# Altium PCB hoanchinh.PcbDoc
Units mm, origin at the board's own origin, x right, y up, seen from the top; angles counter-clockwise.
Board outline 100 x 100 mm, 4 copper layers (Top Layer, Internal Plane 1, Internal Plane 2, Bottom Layer); 28 components, 19 nets, 63 pads, 0 vias.
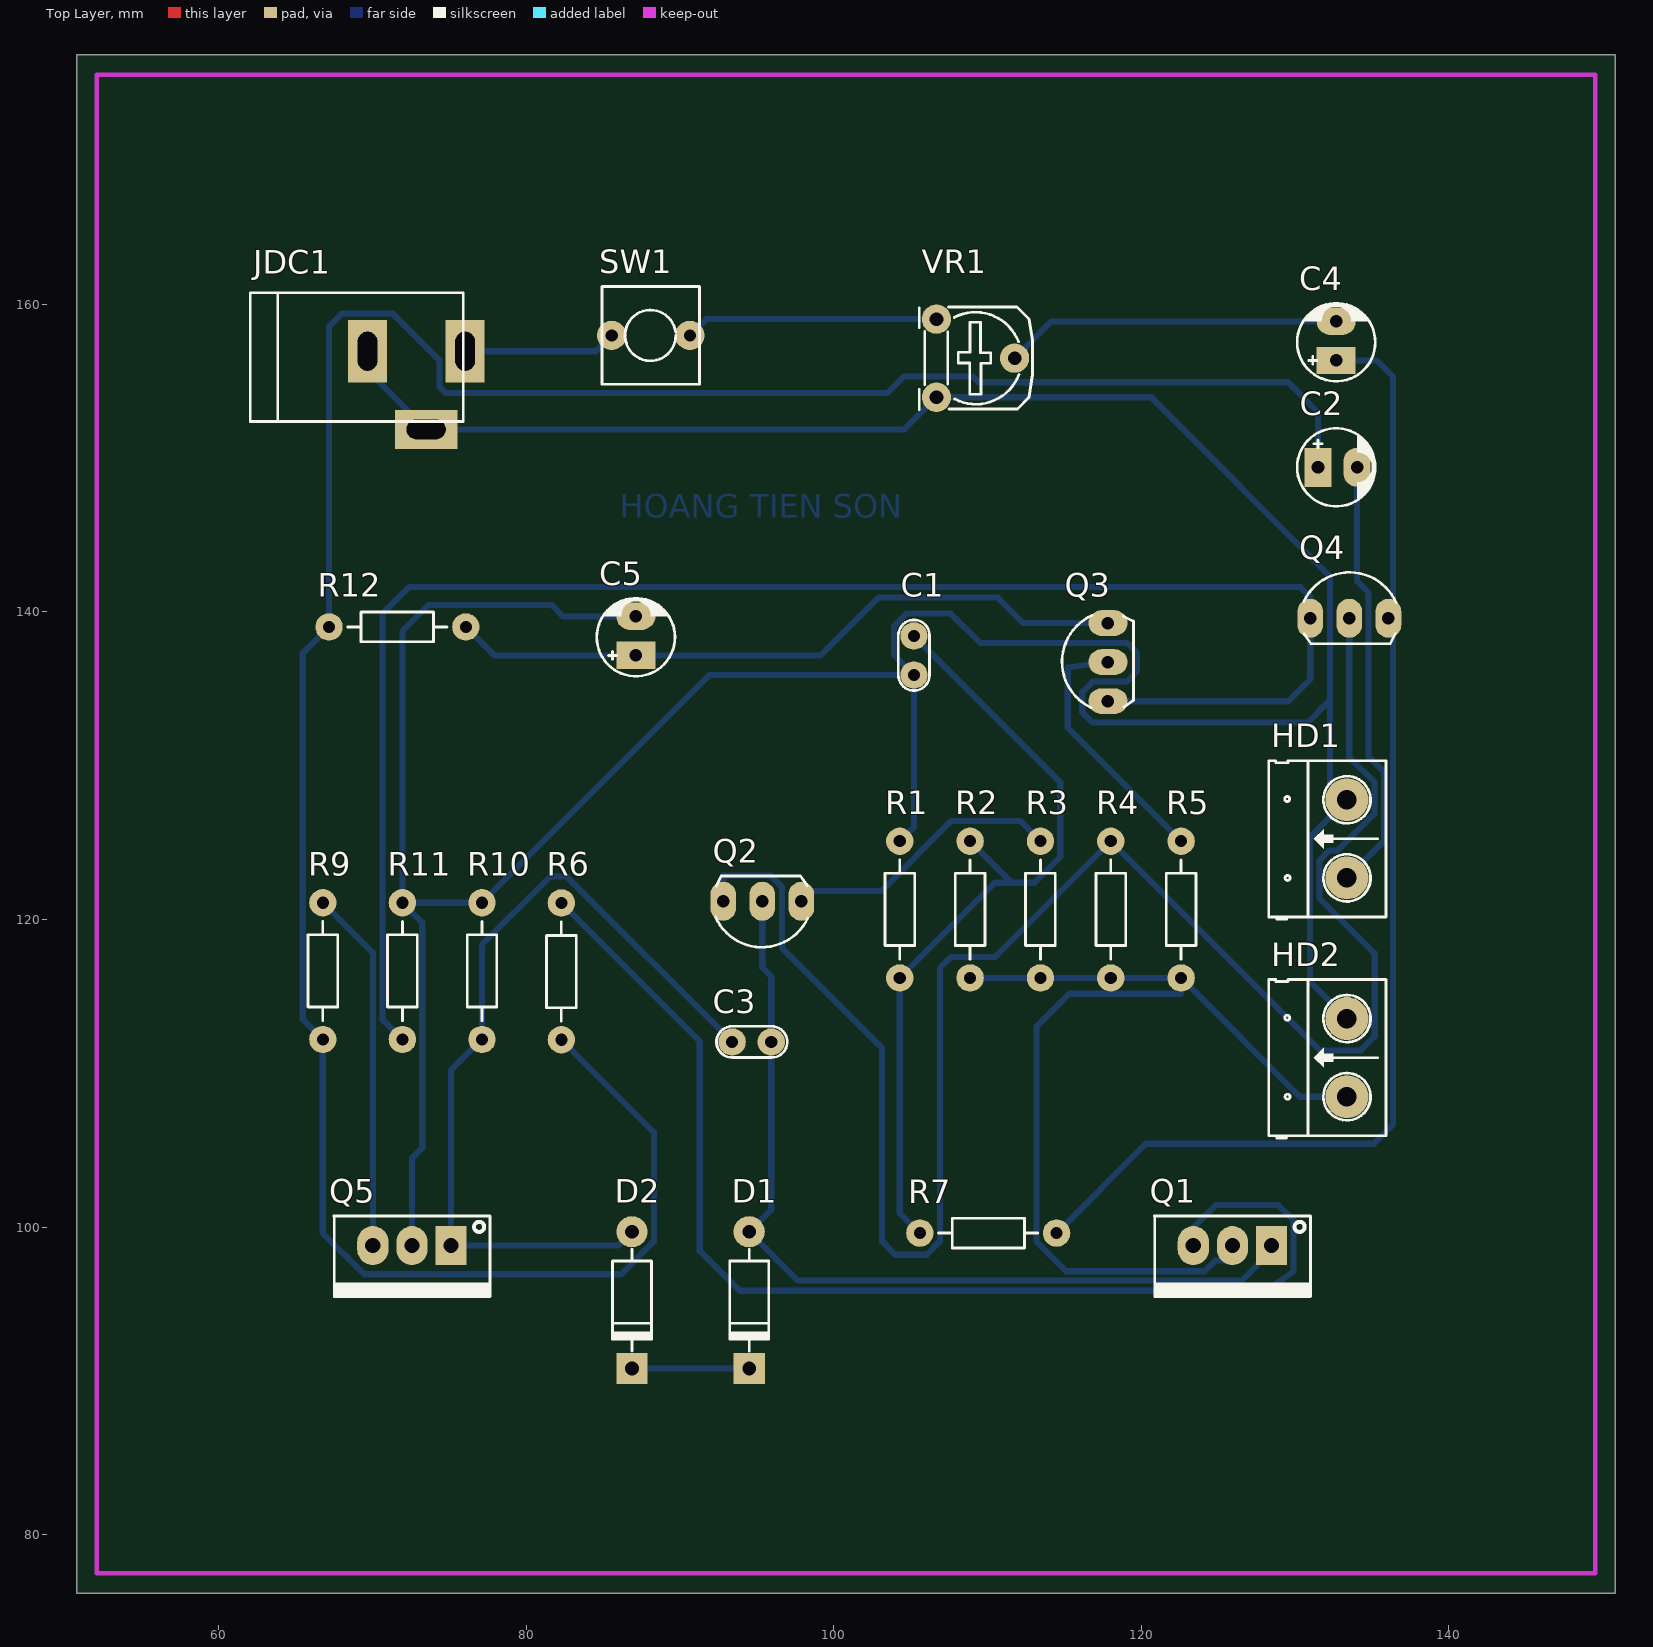
[diagram p0: Top Layer view]
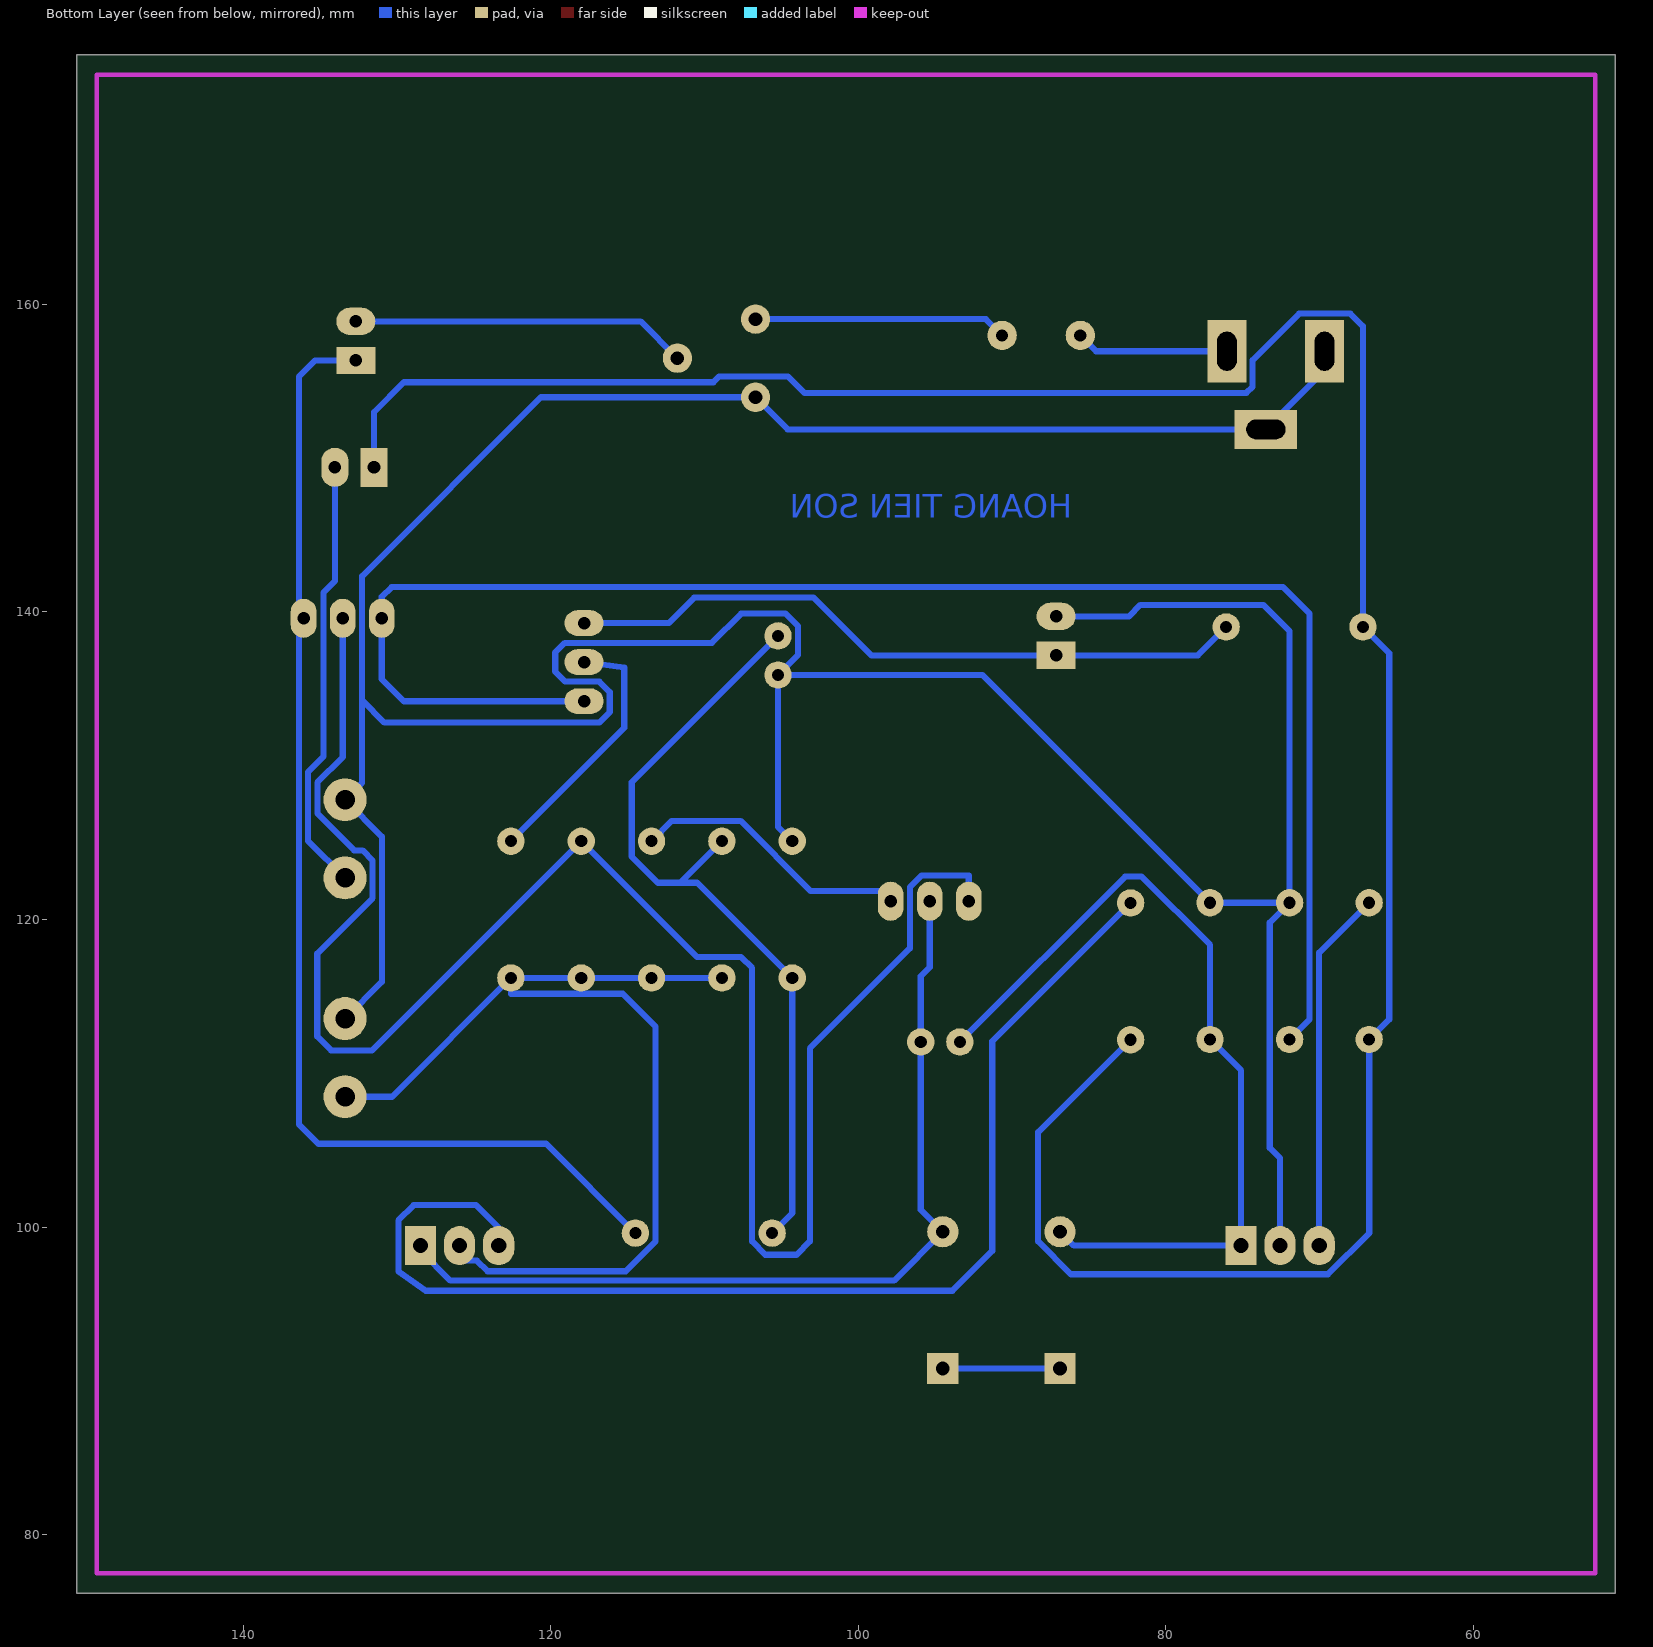
[diagram p1: Bottom Layer view, seen from below]
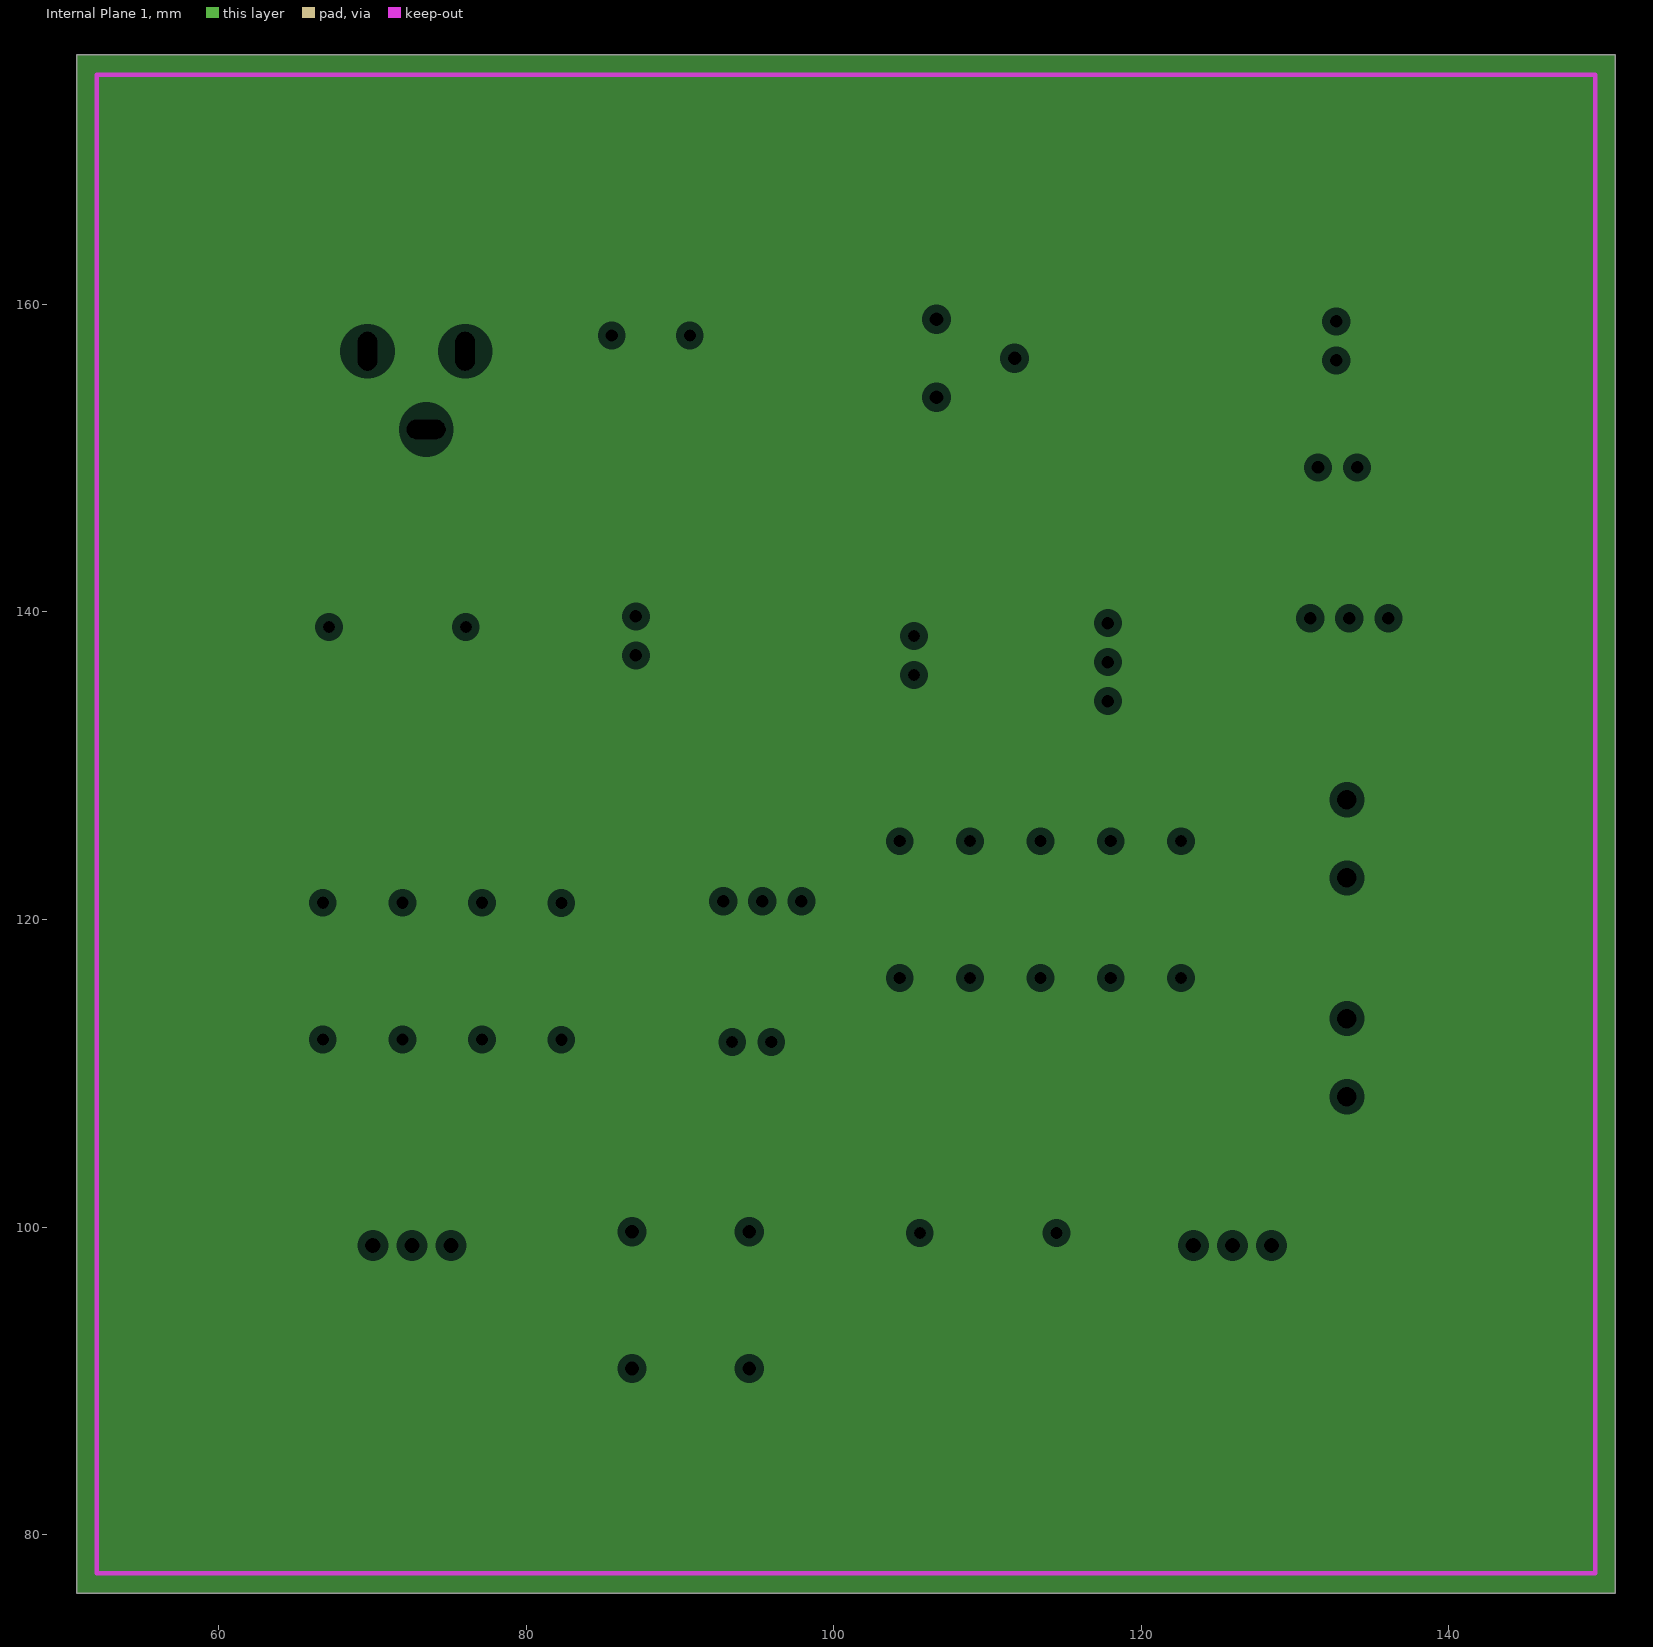
[diagram p2: Internal Plane 1, clearances drawn from the general rule]
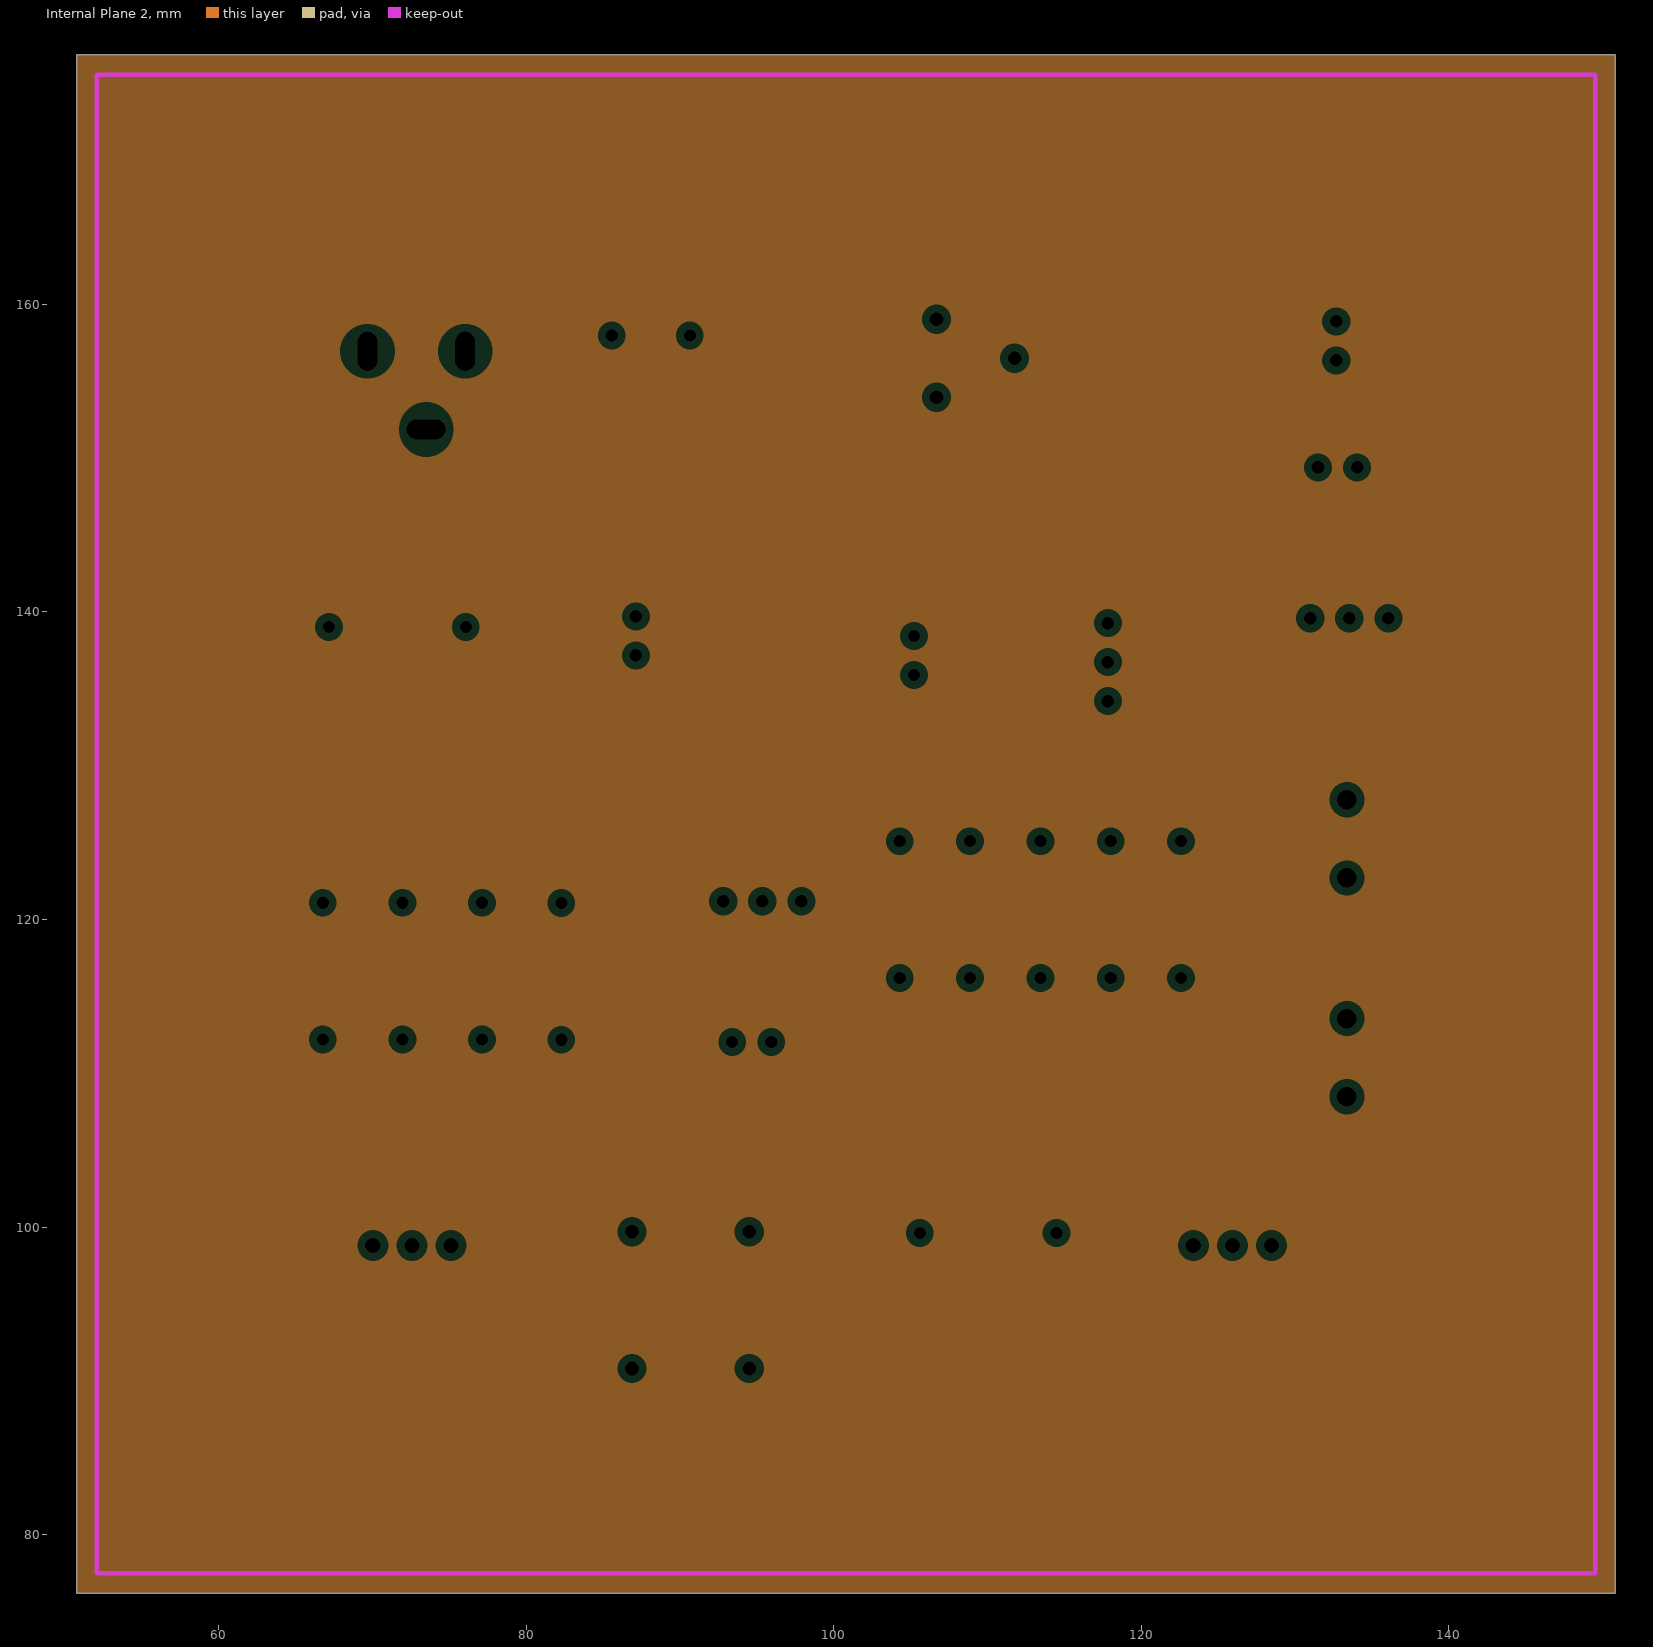
[diagram p3: Internal Plane 2, clearances drawn from the general rule]
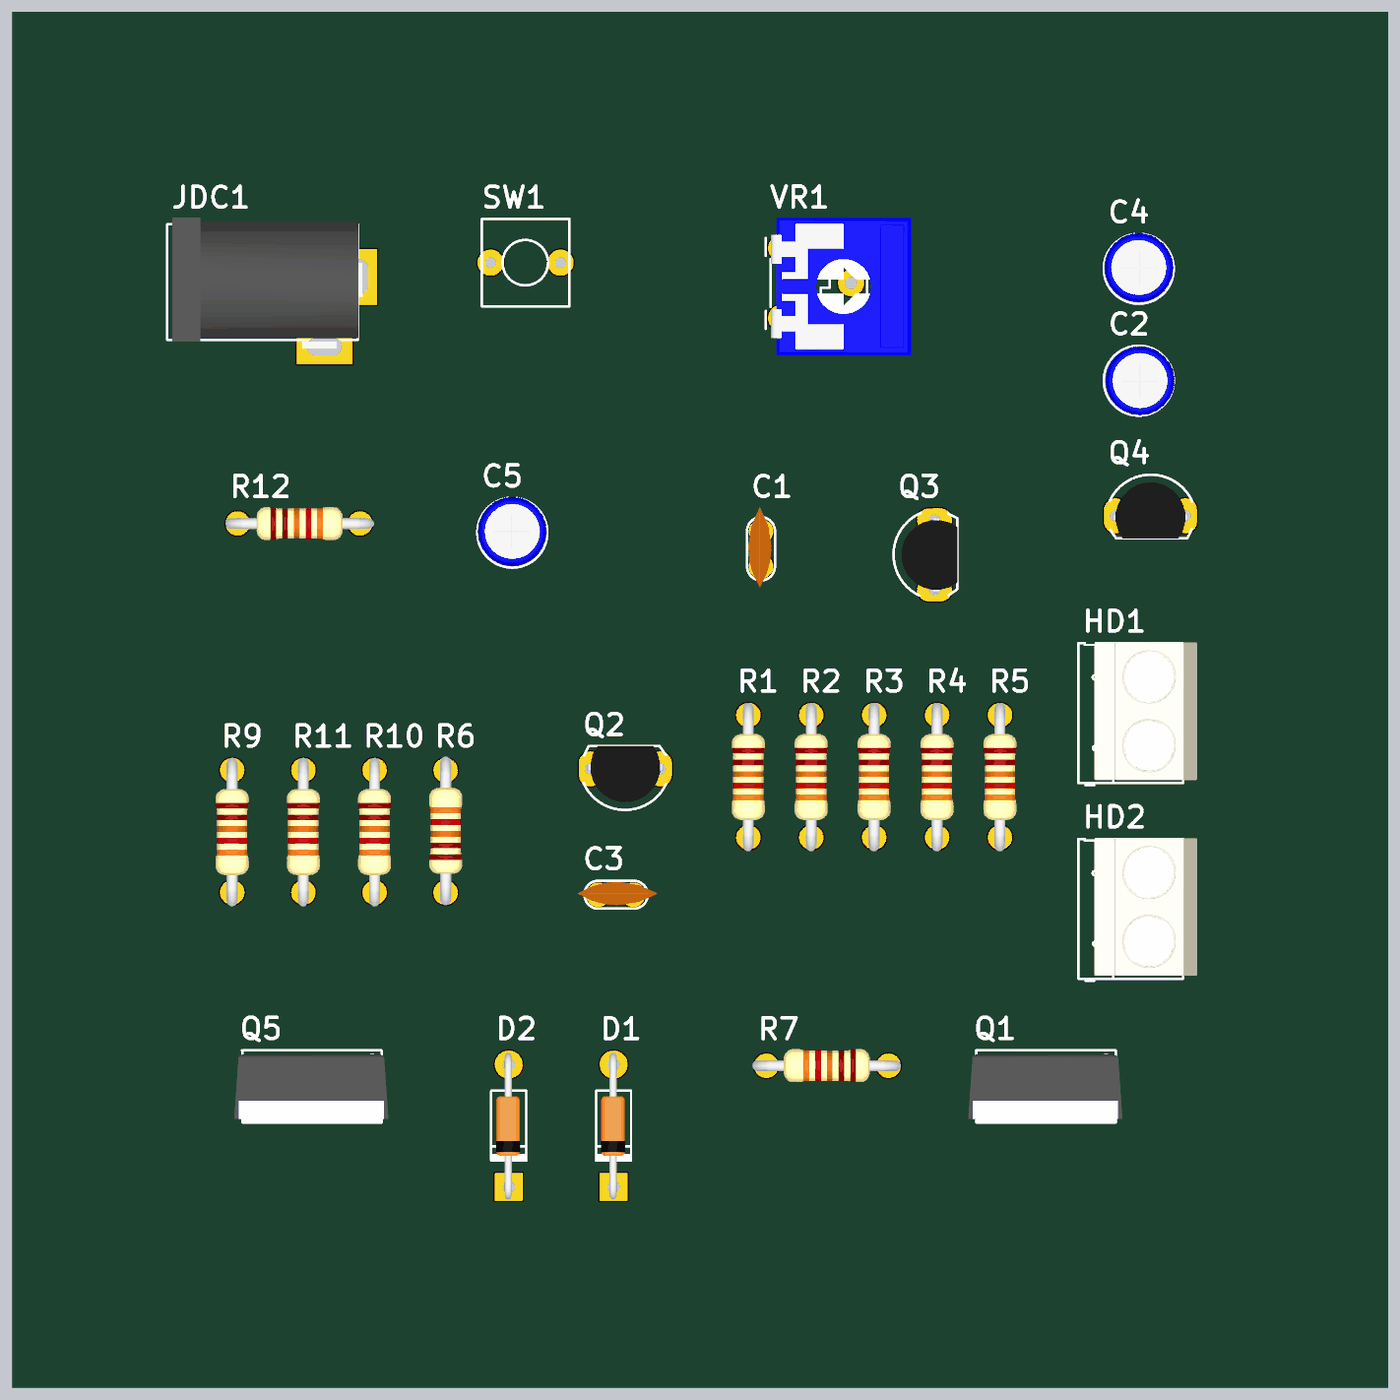
[diagram p4: 3D render of the assembled board from above, using the file's embedded part models]

## Layer stack, top to bottom
Top Layer: signal copper 0.0356
Dielectric: dielectric 0.32, FR-4, Dk 4.8
Internal Plane 1: plane copper 0.0356
Dielectric: dielectric 0.32, FR-4, Dk 4.8
Internal Plane 2: plane copper 0.0356
Dielectric: dielectric 0.32, FR-4, Dk 4.8
Bottom Layer: signal copper 0.0356

## Board outline
50.8,76.2 150.8,76.2 150.8,176.2 50.8,176.2

## Design rules (kind name [scope] priority, off if disabled: settings)
Clearance [All] p1: gap=0.2
PlaneClearance [All] p1: clearance=0.508
PlaneConnect [All] p1: planeconnectstyle=Relief reliefexpansion=0.508 reliefentries=4 reliefconductorwidth=0.254 reliefairgap=0.254
PolygonConnect [All] p1: connectstyle=Relief reliefconductorwidth=0.254 reliefentries=4 polygonreliefangle="90 Angle"
RoutingLayers [All] p1: top layer_v5=FALSE bottom layer_v5=TRUE
RoutingVias [All] p1: holewidth=0.635 width=1.016 viastyle="Through Hole" minholewidth=0.711 minwidth=1.27 maxholewidth=0.711 maxwidth=1.27
SilkscreenOverComponentPads [All] p1: minsilkscreentomaskgap=0.254
SolderMaskExpansion [All] p1: expansion=0.102
Width NET [All] p1: maxlimit=0.4 minlimit=0.4 preferedwidth=0.4
Width GND [InNet('GND')] p2: maxlimit=1 minlimit=1 preferedwidth=1
24 further rules are at their usual default settings.

## Components (designator, comment, footprint, x,y, rotation, side; value= is the part's Value field where it differs from the comment)
C1 "100pF" CN1 105.216,135.888 r90 top
C2 "10uF" CP1/2 131.485,149.388 r0 top
C3 "100pF" CN1 93.399,112.032 r0 top
C4 "10uF" CP1/2 132.668,156.336 r90 top
C5 "10uF" CP1/2 87.143,137.16 r90 top
D1 "1N4007" D1A 94.504,99.692 r90 top
D2 "1N4007" D1A 86.884,99.692 r90 top
HD1 "Header 2" HED2 133.368,122.696 r90 top
HD2 "Header 2" HED2 133.368,108.472 r90 top
JDC1 "Jac DC" DC-IN 72.868,154.392 r0 top
Q1 "TIP41C" QTO-220 128.46,98.79 r180 top
Q2 "A1015" QTO-92 95.356,121.176 r180 top
Q3 "C1815" QTO-92 117.832,136.724 r90 top
Q4 "C1815" QTO-92 133.519,139.572 r0 top
Q5 "TIP42C" QTO-220 75.12,98.79 r180 top
R1 "Res1" R1/4W 104.296,116.192 r90 top
R2 "Res1" R1/4W 108.868,116.192 r90 top
R3 "Res1" R1/4W 113.44,116.192 r90 top
R4 "Res1" R1/4W 118.013,116.192 r90 top
R5 "Res1" R1/4W 122.585,116.192 r90 top
R6 "Res1" R1/4W 82.296,121.067 r270 top
R7 "Res1" R1/4W 105.6,99.603 r0 top
R9 "Res1" R1/4W 66.788,112.192 r90 top
R10 "Res1" R1/4W 77.135,112.192 r90 top
R11 "Res1" R1/4W 71.961,112.192 r90 top
R12 "Res1" R1/4W 76.084,139.01 r180 top
SW1 "SW" SW2 85.568,157.964 r0 top
VR1 "10K" VR 106.68,159.022 r270 top

## Footprints (in the part's own frame and the unit in brackets; to place one, negate y for a bottom-side part, rotate by r counter-clockwise, add the part's x,y. Pads: shape width x height; smd on the part's side, far side on the other; paste and mask are expansions set on the pad)
CN1 [mil]
  round 70 hole 31: 1(0,0) 2(100,0)
  silkscreen extent -40,-40 141,40, body extent -60,-30 170,37, height 265
CP1/2 [mil] "Tu hoa < 22uF/16>50V"
  rect 70x100 hole 32: 1(0,0)
  oval 70x100 hole 32: 2(100,0)
  silkscreen extent -53,-100 147,100, body extent -49,-99 149,99, height 287
D1A [mil] "Diode 1A, W 100mil, L 350mil"
  round 80 hole 35: 1(0,0)
  rect 80x80 hole 35: 2(-350,0)
  silkscreen extent -305,-50 -45,50, body extent -386,-33 34,36, height 84
DC-IN [mil] "Jac DC input"
  rect 100x160 hole 50 slot 100 at 90 deg: 1(125,100) 2(-125,100)
  rect 160x100 hole 50 slot 100 at 0 deg: 3(25,-100)
  silkscreen extent -425,-80 120,250, body extent -410,-105 134,269, height 434
HED2 [mil] "Header 2, 2 pin, hight 300mil, Pin to Pin 200, Colour Green"
  round 110 hole 50: 1(0,0) 2(200,0)
  silkscreen extent -106,-100 300,200, body extent -92,-140 302,155, height 394
QTO-92 [mil] "TO-92"
  oval 66x100 hole 32: 1(-100,0) 2(0,0) 3(100,0)
  silkscreen extent -117,-65 120,118, body extent -109,-66 109,95, height 245
QTO-220 [mil] "TO-220 - 1-2-3"
  rect 80x100 hole 39: 1(0,0)
  oval 80x100 hole 39: 2(100,0) 3(200,0)
  silkscreen extent -100,-76 300,130, body extent -119,-64 322,121, height 755
R1/4W [mil] "R 1/4W, 2 Pin, 350mil"
  round 70 hole 31: 1(0,0) 2(350,0)
  silkscreen extent 48,-38 302,38, body extent -40,-47 386,47, height 111
SW2 [mil] "SW button 2pin, 250x 250 mil"
  round 75 hole 31: 1(0,0) 2(200,0)
  silkscreen extent -25,-125 225,125
VR [mil] "Resistor Variable"
  round 75 hole 35: 1(0,0) 2(100,200) 3(200,0)
  silkscreen extent -31,-44 231,246, body extent -87,-30 307,372, height 165

## Part data
C1 C3: library part CN1, "Cap np  1pF - 472pF"
C2 C4 C5: library part CP1, "Cap P  0,1uF < 22uF , 16 - 50V"
D1 D2: library part D1A, "Diode 1A"
HD1 HD2: library part Hed2, "Header 2 (Green)"
JDC1: library part DCIN, "Jac DC input"
Q1: "NPN 2W, BCE"
Q2: "PNP 600mW, ECB"
Q3 Q4: "NPN 600mW, ECB"
Q5: "PNP 2W, BCE"
R1 R2 R3 R4 R5 R6 R7 R9 R10 R11 R12: library part Res1_1, "Resistor"
SW1: library part SW2, "Switch button 2 pin"
VR1: library part VR1, "Var Resistor"

## Nets (pads, with @x,y where several pads share a name; then routed paths per layer and width w, separated by ;. In a path a pad name is that pad's centre, name@x,y a point inside that pad or via, vN(x,y) a via of type N, cw(c..) or ccw(c..) an arc to the next point about the centre after c; other vN are vias at no path point)
GND: C1.1 C5.2 HD1.2 HD2.2 JDC1.2 JDC1.3 Q5.2 R1.2 R10.2 R11.2 VR1.3 | length 262.4
  Bottom Layer w0.4: JDC1.2 69.693,155.662 JDC1.3 104.59,151.852 VR1.3 120.632,153.942 132.258,142.316 ; Q5.2 72.58,104.47 73.254,105.144 73.254,119.79 R11.2 ; C5.2 82.398,139.7 81.658,140.44 73.66,140.44 71.961,138.741 R11.2 ; R1.2 105.216,126.002 C1.1 ; HD2.2 130.971,115.949 130.971,125.379 HD1.2 132.258,128.886 132.258,134.239 ; R11.2 R10.2 91.941,135.888 C1.1 ; C1.1 103.911,137.192 103.911,139.065 104.724,139.878 107.62,139.878 109.525,137.973 119.075,137.973 119.697,137.35 119.697,136.106 119.05,135.458 116.84,135.458 116.154,134.772 116.154,133.477 116.84,132.791 130.81,132.791 132.258,134.239 ; 132.258,134.239 132.258,142.316 ; 132.258,134.239 132.258,142.316
NetC1_2: C1.2 R1.1 R2.2 R7.1 | length 54.4
  Bottom Layer w0.4: C1.2 114.732,128.912 114.732,124.079 113.03,122.377 ; R7.1 104.296,100.907 R1.1 110.481,122.377 111.573,122.377 ; R2.2 111.573,122.377 ; 111.573,122.377 113.03,122.377 ; 111.573,122.377 113.03,122.377
NetC2_1: C2.1 R6.2 R9.1 R12.2 | length 172.1
  Bottom Layer w0.4: R6.2 88.316,106.157 88.316,99.06 86.182,96.926 69.469,96.926 66.788,99.607 R9.1 65.481,113.499 65.481,137.297 R12.2 67.194,158.558 68.021,159.385 71.349,159.385 74.371,156.362 74.371,154.623 74.765,154.229 103.505,154.229 104.572,155.296 109.042,155.296 109.423,154.915 129.54,154.915 131.485,152.97 C2.1
NetC2_2: C2.2 HD1.1 | length 28.4
  Bottom Layer w0.4: HD1.1 135.765,125.093 135.765,129.587 134.772,130.579 134.772,141.249 134.025,141.997 C2.2
NetC3_1: C3.1 D2.1 Q5.1 R10.1 | length 55.1
  Bottom Layer w0.4: D2.1 85.982,98.79 Q5.1 75.12,110.177 R10.1 77.135,118.335 81.583,122.784 82.647,122.784 C3.1
NetC3_2: C3.2 D1.1 Q1.1 Q2.2 | length 58.7
  Bottom Layer w0.4: Q2.2 95.356,116.889 95.939,116.307 C3.2 95.939,101.127 D1.1 97.676,96.52 126.518,96.52 128.46,98.463 Q1.1
NetC4_1: C4.1 Q4.3 R7.2 | length 93.5
  Bottom Layer w0.4: R7.2 120.297,105.41 135.095,105.41 136.365,106.68 Q4.3@136.365,139.572 ; C4.1 135.306,156.336 136.365,155.277 ; Q4.3 Q4.3@136.365,139.572 ; Q4.3@136.365,139.572 136.365,155.277 ; Q4.3@136.365,139.572 136.365,155.277
NetC4_2: C4.2 VR1.2 | length 21.9
  Bottom Layer w0.4: VR1.2 114.154,158.876 C4.2
NetC5_1: C5.1 Q3.3 R12.1 | length 44.8
  Bottom Layer w0.4: R12.1 77.934,137.16 C5.1 99.151,137.16 102.907,140.917 110.666,140.917 112.318,139.264 Q3.3
NetD1_2: D1.2 D2.2 | length 7.6
  Bottom Layer w0.4: D2.2 D1.2
NetHD2_1: HD2.1 Q1.2 R2.1 R3.1 R4.1 R5.1 | length 67.8
  Bottom Layer w0.4: R2.1 R3.1 R4.1 R5.1 ; Q1.2 125.92,97.815 124.79,97.815 124.095,97.12 115.122,97.12 113.182,99.06 113.182,113.03 115.316,115.164 118.013,115.164 122.585,115.164 R5.1 ; HD2.1 130.305,108.472 R5.1
NetJDC1_1: JDC1.1 SW1.1 | length 10
  Bottom Layer w0.4: JDC1.1 84.536,156.932 SW1.1
NetQ1_3: Q1.3 R6.1 | length 78.4
  Bottom Layer w0.4: R6.1 91.288,112.075 91.288,98.45 93.878,95.86 128.118,95.86 129.896,97.104 129.896,100.432 128.905,101.422 124.853,101.422 123.38,99.949 Q1.3
NetQ2_1: Q2.1 R3.2 | length 18.6
  Bottom Layer w0.4: Q2.1 97.896,121.844 103.093,121.844 107.648,126.398 112.125,126.398 R3.2
NetQ2_3: Q2.3 Q4.2 R4.2 | length 122.7
  Bottom Layer w0.4: Q2.3 92.816,122.86 95.885,122.86 96.647,122.098 96.647,118.11 103.149,111.608 103.149,99.06 104.013,98.196 106.045,98.196 106.909,99.06 106.909,116.84 107.62,117.551 110.482,117.551 R4.2 131.614,111.481 134.264,111.481 135.179,112.395 135.179,117.78 131.571,121.388 131.571,123.825 132.231,124.485 132.766,124.485 135.165,126.885 135.165,128.905 133.519,130.551 Q4.2
NetQ3_1: Q3.1 Q4.1 R11.1 | length 108.6
  Bottom Layer w0.4: R11.1 70.663,113.491 70.663,139.878 72.39,141.605 130.344,141.605 130.979,140.97 Q4.1 130.979,135.623 129.54,134.184 Q3.1
NetQ3_2: Q3.2 R5.2 | length 17
  Bottom Layer w0.4: Q3.2 115.214,136.369 115.214,132.453 R5.2
NetQ5_3: Q5.3 R9.2 | length 23.6
  Bottom Layer w0.4: R9.2 70.04,117.83 Q5.3
NetSW1_2: SW1.2 VR1.1 | length 16.5
  Bottom Layer w0.4: SW1.2 91.706,159.022 VR1.1

## Polygon pours and split planes (outlines as drawn)
no net on Internal Plane 1 (split plane): 150.8,76.2 50.8,76.2 50.8,176.2 150.8,176.2
no net on Internal Plane 2 (split plane): 150.8,76.2 50.8,76.2 50.8,176.2 150.8,176.2

## Keep-outs
Keep-Out Layer:
  lines w0.3: 52.1,77.5 52.1,174.9 149.5,174.9 149.5,77.5 52.1,77.5

## Other copper
Bottom Layer:
  text "HOANG TIEN SON" at 86.1,146.1 h1.52

## Dimensions
52.1,77.5 to 52.1,174.9 on Mechanical 1
52.1,77.5 to 149.5,77.5 on Mechanical 1